# EAGLE board adaptive lighting system with pic (EAGLE 6.5.0)
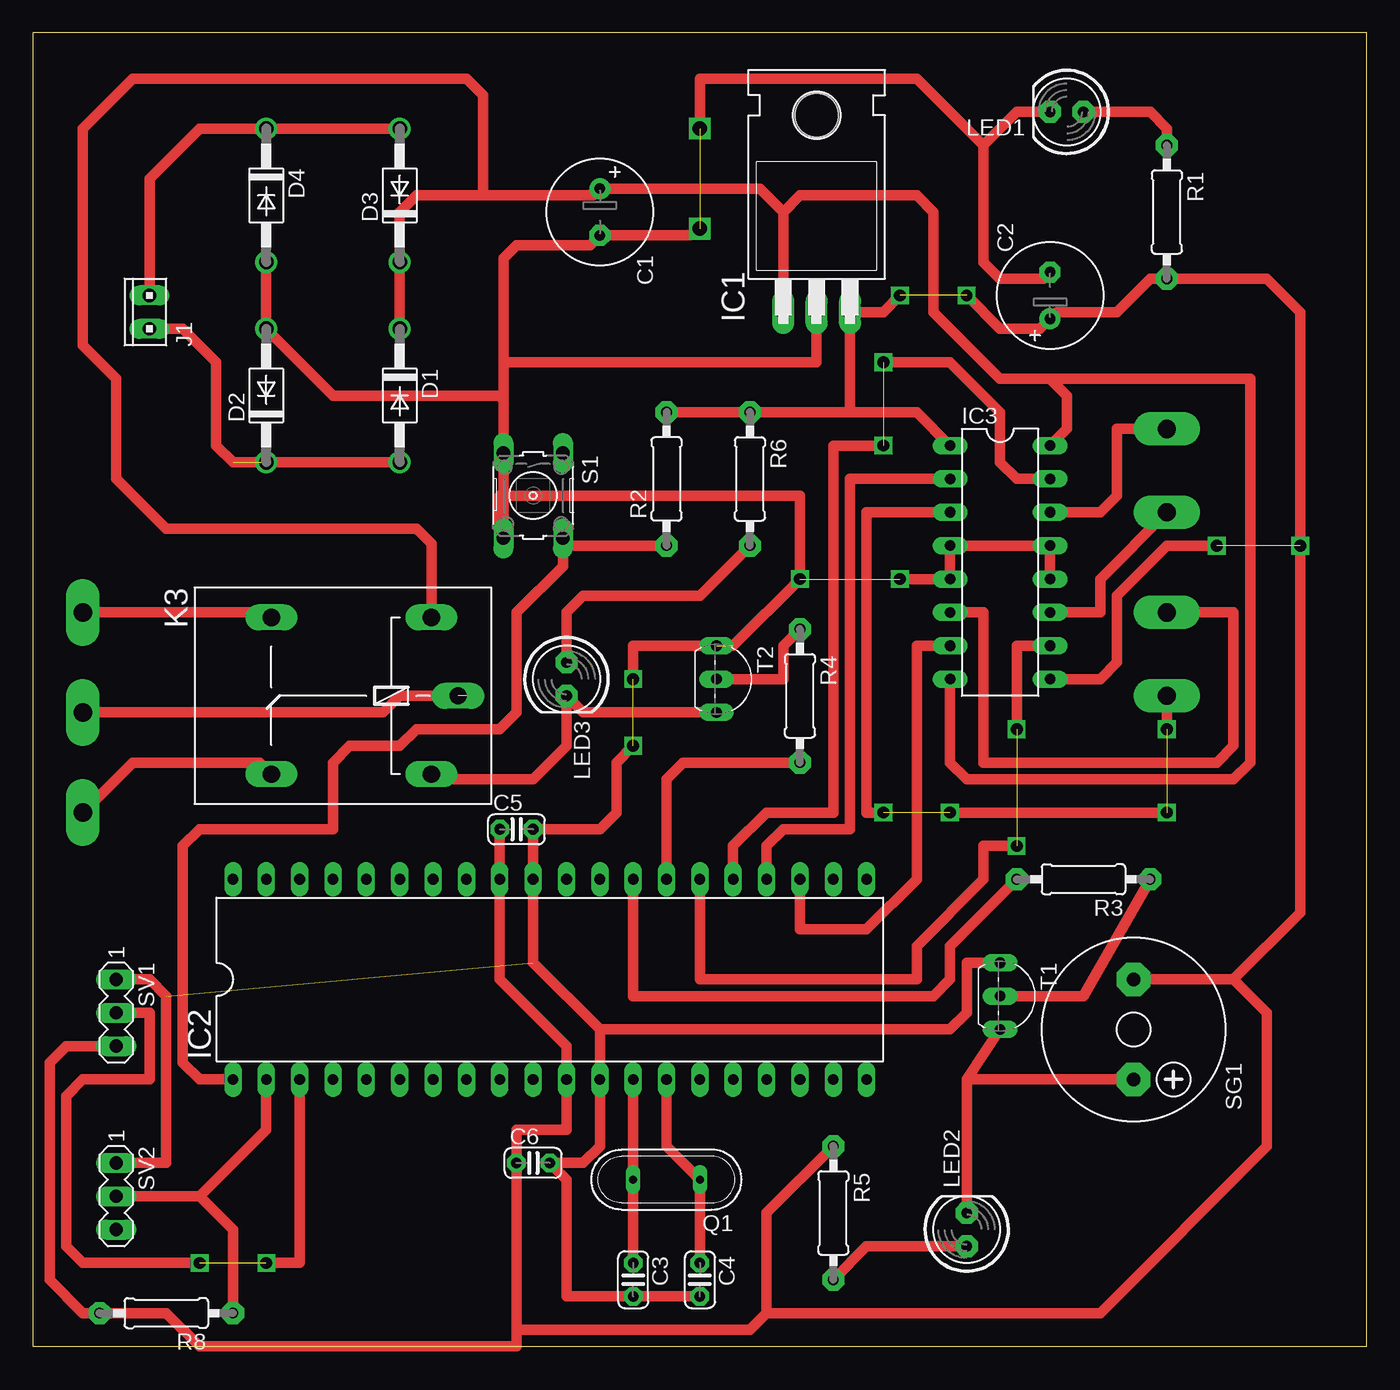
[diagram p0: board, top side]

Size 101.58 x 100 mm. Coordinates in mm from the lower left corner, seen from the top.
Outline: 0,0 101.58,0 101.58,100 0,100 0,0
Copper layers (1*16): Top 0.035mm / dielectric 1.5mm / Bottom 0.035mm
Design rules "default": minimum track width 10mil, minimum drill 24mil, track to track 8mil, track to pad 8mil, pad to pad 8mil, via to via 8mil, smd to smd 8mil, copper to edge 40mil, drill to drill 8mil, minimum pad ring 10mil, minimum via ring 8mil, stop-mask expansion 4mil, vias tented up to drill 0mil, thermal gap 10mil

## Footprints (pad centres in the part's own frame; a part is rotated, then mirrored left to right if it is on the bottom)
E3,5-8 = drill 0.813 pad 1.6: + -1.778,0 | drill 0.813 pad 1.6 octagon: - 1.778,0
C025-024X044 = drill 0.813 pad 1.422 octagon: 1 -1.27,0; 2 1.27,0
DO41-10 = drill 1.118: A 5.08,0; C -5.08,0
TO220H = drill 1.118 long: 1 -2.54,-10.16; 2 0,-10.16; 3 2.54,-10.16 | hole 3.302: 0,4.826
DIL40 = drill 0.813 long: 1 -24.13,-7.62; 2 -21.59,-7.62; 3 -19.05,-7.62; 4 -16.51,-7.62; 5 -13.97,-7.62; 6 -11.43,-7.62; 7 -8.89,-7.62; 8 -6.35,-7.62; 9 -3.81,-7.62; 10 -1.27,-7.62; 11 1.27,-7.62; 12 3.81,-7.62; 13 6.35,-7.62; 14 8.89,-7.62; 15 11.43,-7.62; 16 13.97,-7.62; 17 16.51,-7.62; 18 19.05,-7.62; 19 21.59,-7.62; 20 24.13,-7.62; 21 24.13,7.62; 22 21.59,7.62; 23 19.05,7.62; 24 16.51,7.62; 25 13.97,7.62; 26 11.43,7.62; 27 8.89,7.62; 28 6.35,7.62; 29 3.81,7.62; 30 1.27,7.62; 31 -1.27,7.62; 32 -3.81,7.62; 33 -6.35,7.62; 34 -8.89,7.62; 35 -11.43,7.62; 36 -13.97,7.62; 37 -16.51,7.62; 38 -19.05,7.62; 39 -21.59,7.62; 40 -24.13,7.62
DIL16 = drill 0.813 long: 1 -8.89,-3.81; 2 -6.35,-3.81; 3 -3.81,-3.81; 4 -1.27,-3.81; 5 1.27,-3.81; 6 3.81,-3.81; 7 6.35,-3.81; 8 8.89,-3.81; 9 8.89,3.81; 10 6.35,3.81; 11 3.81,3.81; 12 1.27,3.81; 13 -1.27,3.81; 14 -3.81,3.81; 15 -6.35,3.81; 16 -8.89,3.81
10X02MTA = drill 1.016 long: 1 1.27,0; 2 -1.27,0
1X1-BIGPOGO = drill 1.4 pad 2.54 long: P$1 0,0
G5LE = drill 1.321 long: 1 -7.493,-5.969; 2 -7.493,5.969; O 4.699,5.969; P -9.525,0; S 4.699,-5.969
LED5MM = drill 0.813 pad 1.676 octagon: A -1.27,0; K 1.27,0
QS = drill 0.61 long: 1 -2.54,0; 2 2.54,0
0207/10 = drill 0.813 pad 1.676 octagon: 1 -5.08,0; 2 5.08,0
B3F-10XX = drill 1.016 long: 1 -3.251,2.261; 2 3.251,2.261; 3 -3.251,-2.261; 4 3.251,-2.261
F/CM12P = drill 1.016 pad 2.54 octagon: + 3.81,0; - -3.81,0
MA03-1 = drill 1.016 long: 1 -2.54,0; 2 0,0; 3 2.54,0
TO92-EBC-OVAL = drill 0.813 long: B 0,-1.27; C 2.54,-1.27; E -2.54,-1.27

## Placement (x,y rotation side)
C1  [E3,5-8]  43.18,86.36 270 top
C2  [E3,5-8]  77.47,80.01 90 top
C3  [C025-024X044]  45.72,5.08 270 top
C4  [C025-024X044]  50.8,5.08 270 top
C5  [C025-024X044]  36.83,39.37 0 top
C6  [C025-024X044]  38.1,13.97 0 top
D1  1N4004  [DO41-10]  27.94,72.39 270 top
D2  1N4004  [DO41-10]  17.78,72.39 90 top
D3  1N4004  [DO41-10]  27.94,87.63 90 top
D4  1N4004  [DO41-10]  17.78,87.63 270 top
IC1  7805T  [TO220H]  59.69,88.9 0 top
IC2  PIC18F4550_40  [DIL40]  39.37,27.94 0 top
IC3  L293D  [DIL16]  73.66,59.69 270 top
J1  [10X02MTA]  8.89,78.74 90 top
JP1  [1X1-BIGPOGO]  86.36,49.53 180 top
JP2  [1X1-BIGPOGO]  3.81,40.64 90 top
JP3  [1X1-BIGPOGO]  3.81,55.88 90 top
JP4  [1X1-BIGPOGO]  3.81,48.26 90 top
JP8  [1X1-BIGPOGO]  86.36,55.88 180 top
JP9  [1X1-BIGPOGO]  86.36,69.85 180 top
JP10  [1X1-BIGPOGO]  86.36,63.5 180 top
K3  G5L  [G5LE]  22.86,49.53 180 top
LED1  [LED5MM]  78.74,93.98 180 top
LED2  [LED5MM]  71.12,8.89 90 top
LED3  [LED5MM]  40.64,50.8 270 top
Q1  [QS]  48.26,12.7 180 top
R1  [0207/10]  86.36,86.36 270 top
R2  10k  [0207/10]  48.26,66.04 90 top
R3  10k  [0207/10]  80.01,35.56 180 top
R4  10k  [0207/10]  58.42,49.53 270 top
R5  10k  [0207/10]  60.96,10.16 270 top
R6  10k  [0207/10]  54.61,66.04 270 top
R8  10k  [0207/10]  10.16,2.54 180 top
S1  [B3F-10XX]  38.1,64.77 270 top
SG1  F/CM12P  [F/CM12P]  83.82,24.13 270 top
SV1  [MA03-1]  6.35,25.4 270 top
SV2  [MA03-1]  6.35,11.43 270 top
T1  2N2222  [TO92-EBC-OVAL]  74.93,26.67 270 top
T2  2N2222  [TO92-EBC-OVAL]  53.34,50.8 270 top

## Library data of the parts
C1-C6 IC1 JP1-JP4 JP8-JP10 LED1-LED3 R1-R6 R8 T1 T2 = adafruit
D1-D4 = diode
IC2 = microchip; MF: MICROCHIP; MPN: PIC18F4550-I/P; OC_FARNELL: 9321357; OC_NEWARK: 74K8623
IC3 = st-microelectronics; MPN: L293D; OC_FARNELL: 9589619; OC_NEWARK: 56P8249
J1 = con-amp
K3 = relay; OC_FARNELL: unknown; OC_NEWARK: unknown
Q1 = special
S1 = switch-omron; MPN: B3F-1000; OC_FARNELL: 176432; OC_NEWARK: 36M3542
SG1 = buzzer; OC_FARNELL: unknown; OC_NEWARK: unknown
SV1 SV2 = con-lstb; OC_FARNELL: unknown; OC_NEWARK: unknown

## Nets
+5V: C2.+ C5.1 C6.1 IC1.3 IC2.11 IC2.32 IC3.1 IC3.9 R1.2 R2.2 R5.1 R6.1 R8.2 SG1.- SV1.3
+12V: C1.+ D1.C D3.C IC1.1 IC3.8 IC3.16 K3.1
GND: C1.- C2.- C3.2 C4.2 C5.2 C6.2 D2.A D4.A IC1.2 IC2.12 IC2.31 IC3.4 IC3.5 IC3.12 IC3.13 LED1.K S1.3 S1.4 SV1.1 SV2.1 T1.E T2.E
N$2: D1.A D2.C J1.2
N$3: D3.A D4.C J1.1
N$4: C4.1 IC2.14 Q1.1
N$5: C3.1 IC2.13 Q1.2
N$6: LED1.A R1.1
N$7: LED2.A R5.2
N$8: IC2.2 R8.1 SV2.2
N$9: IC2.3 SV1.2
N$10: R3.1 T1.B
N$11: IC2.1 R2.1 S1.2
N$12: R4.1 T2.B
N$15: LED2.K SG1.+ T1.C
N$16: K3.2 LED3.K T2.C
N$17: LED3.A R6.2
N$18: JP4.P$1 K3.P
N$19: JP2.P$1 K3.O
N$20: JP3.P$1 K3.S
N$29: IC3.3 JP1.P$1
N$31: IC3.6 JP8.P$1
N$32: IC3.14 JP9.P$1
N$33: IC3.11 JP10.P$1
N$34: IC2.24 IC3.2
N$35: IC2.25 IC3.15
N$36: IC2.23 IC3.7
N$37: IC2.26 IC3.10
N$39: IC2.27 R4.2
N$40: IC2.28 R3.2

## Tracks (layer width: path | path; a pad name or v marks a point on that pad's centre or on a via)
+5V  (via drill 0.9)  (2 unrouted)
  Top 0.813: R2.2 R6.1 62.23,71.12 | 62.23,71.12 IC1.3 64.77,78.74 v66.04,80.01 | C5.1 IC2.32 35.56,27.94 40.64,22.86 IC2.11 40.64,16.51 36.83,16.51 C6.1 36.83,1.27 | 62.23,71.12 67.31,71.12 IC3.1 | R5.1 55.88,10.16 55.88,2.54 | 55.88,2.54 54.61,1.27 36.83,1.27 | 91.44,27.94 93.98,25.4 93.98,15.24 81.28,2.54 55.88,2.54 | SV1.3 2.54,22.86 1.27,21.59 1.27,5.08 3.81,2.54 R8.2 10.16,2.54 12.7,0 36.83,0 36.83,1.27 | SG1.- 91.44,27.94 | 91.44,27.94 96.52,33.02 v96.52,60.96 96.52,78.74 93.98,81.28 R1.2 85.09,81.28 82.55,78.74 77.98,78.74 C2.+ 76.71,77.47 73.66,77.47 v71.12,80.01 | IC3.9 81.28,50.8 82.55,52.07 82.55,57.15 86.36,60.96 v90.17,60.96
+12V
  Top 0.813: D1.C D3.C 27.94,86.36 29.21,87.63 34.29,87.63 | 57.15,77.47 IC1.1 57.15,86.36 | 34.29,87.63 42.67,87.63 C1.+ 55.37,88.14 57.15,86.36 | 57.15,86.36 58.42,87.63 67.31,87.63 68.58,86.36 68.58,78.74 73.66,73.66 77.47,73.66 | 77.47,73.66 78.74,72.39 78.74,69.85 IC3.16 | K3.1 30.35,61.09 29.21,62.23 10.16,62.23 6.35,66.04 6.35,73.66 3.81,76.2 3.81,92.71 7.62,96.52 33.02,96.52 34.29,95.25 34.29,87.63 | IC3.8 69.85,44.45 71.12,43.18 91.44,43.18 92.71,44.45 92.71,73.66 77.47,73.66
GND  (via drill 0.9, 1.1)  (5 unrouted)
  Top 0.813: D4.A D2.A 22.86,72.39 35.56,72.39 35.84,72.11 | LED1.K 74.93,93.98 72.39,91.44 | C2.- 76.96,81.28 73.66,81.28 72.39,82.55 72.39,91.44 | 43.18,24.13 38.1,29.21 IC2.31 C5.2 43.18,39.37 44.45,40.64 44.45,44.45 v45.72,45.72 | 43.18,24.13 IC2.12 43.18,15.24 41.91,13.97 C6.2 40.64,12.7 40.64,3.81 C3.2 C4.2 | SV1.1 8.89,27.94 10.16,26.67 10.16,13.97 SV2.1 | T1.E 71.12,29.21 71.12,25.4 69.85,24.13 43.18,24.13 | T2.E 45.72,53.34 v45.72,50.8 | v66.04,58.42 IC3.5 IC3.4 IC3.13 IC3.12 | 53.34,53.34 v58.42,58.42 58.42,64.77 35.56,64.77 35.56,61.8 S1.4 S1.3 35.84,72.11 | 35.84,74.93 35.84,82.83 36.83,83.82 42.42,83.82 C1.- 50.04,84.58 v50.8,85.09 | 35.84,74.93 35.84,72.11 | IC1.2 59.69,74.93 35.84,74.93 | 72.39,91.44 67.31,96.52 50.8,96.52 v50.8,92.71
N$2  (1 unrouted)
  Top 0.813: J1.2 11.43,77.47 13.97,74.93 13.97,68.58 15.24,67.31 D1.A
N$3
  Top 0.813: J1.1 8.89,88.9 12.7,92.71 D4.C D3.A
N$4
  Top 0.813: IC2.14 48.26,15.24 Q1.1 C4.1
N$5
  Top 0.813: IC2.13 Q1.2 C3.1
N$6
  Top 0.813: LED1.A 85.09,93.98 86.36,92.71 R1.1
N$7
  Top 0.813: R5.2 63.5,7.62 LED2.A
N$8
  Top 0.813: SV2.2 12.7,11.43 | 12.7,11.43 17.78,16.51 IC2.2 | 12.7,11.43 15.24,8.89 R8.1
N$9  (via drill 0.9)  (1 unrouted)
  Top 0.813: IC2.3 20.32,6.35 v17.78,6.35 | v12.7,6.35 3.81,6.35 2.54,7.62 2.54,19.05 3.81,20.32 8.89,20.32 8.89,25.4 SV1.2
N$10
  Top 0.813: T1.B 80.01,26.67 R3.1
N$11
  Top 0.813: R2.1 40.64,60.96 40.64,61.24 S1.2 40.36,59.41 36.83,55.88 36.83,48.26 35.56,46.99 29.21,46.99 27.94,45.72 24.13,45.72 22.86,44.45 22.86,39.37 12.7,39.37 11.43,38.1 11.43,21.59 12.7,20.32 IC2.1
N$12
  Top 0.813: T2.B 57.15,50.8 57.15,53.34 R4.1
N$15
  Top 0.813: LED2.K 71.12,20.32 | T1.C 71.12,20.32 | 71.12,20.32 SG1.+
N$16
  Top 0.813: 29.97,43.18 38.1,43.18 40.64,45.72 LED3.K 41.91,48.26 T2.C | 29.21,43.18 29.97,43.18 | 29.97,43.18 K3.2
N$17
  Top 0.813: LED3.A 40.64,55.88 41.91,57.15 50.8,57.15 R6.2
N$18  (1 unrouted)
  Top 0.813: JP4.P$1 26.67,48.26 27.94,49.53 33.02,49.53
N$19
  Top 0.813: JP2.P$1 7.62,44.45 17.27,44.45 K3.O
N$20
  Top 0.813: JP3.P$1 17.78,55.88 K3.S
N$29  (via drill 0.9)  (2 unrouted)
  Top 0.813: IC3.3 63.5,63.5 63.5,40.64 v64.77,40.64 | JP1.P$1 v86.36,46.99 | v86.36,40.64 v69.85,40.64
N$31
  Top 0.813: IC3.6 72.39,55.88 72.39,44.45 90.17,44.45 91.44,45.72 91.44,55.88 JP8.P$1
N$32
  Top 0.813: IC3.14 81.28,63.5 82.55,64.77 82.55,69.85 JP9.P$1
N$33
  Top 0.813: JP10.P$1 81.28,58.42 81.28,55.88 IC3.11
N$34
  Top 0.813: IC2.24 55.88,38.1 57.15,39.37 62.23,39.37 62.23,66.04 IC3.2
N$35  (via drill 0.9)  (1 unrouted)
  Top 0.813: IC2.25 53.34,38.1 55.88,40.64 60.96,40.64 60.96,68.58 v64.77,68.58 | IC3.15 74.93,66.04 73.66,67.31 73.66,71.12 69.85,74.93 v64.77,74.93
N$36
  Top 0.813: IC3.7 67.31,53.34 67.31,35.56 63.5,31.75 58.42,31.75 IC2.23
N$37  (via drill 0.9)  (1 unrouted)
  Top 0.813: IC3.10 74.93,53.34 v74.93,46.99 | v74.93,38.1 72.39,38.1 72.39,35.56 67.31,30.48 67.31,27.94 50.8,27.94 IC2.26
N$39
  Top 0.813: R4.2 49.53,44.45 48.26,43.18 IC2.27
N$40
  Top 0.813: IC2.28 45.72,26.67 68.58,26.67 69.85,27.94 69.85,30.48 R3.2